# Altium PCB DSP5509_FPGACIII.PcbDoc (part 1 of 3)
Units mm, origin at the board's own origin, x right, y up, seen from the top; angles counter-clockwise.
Board outline 143.99 x 90.04 mm, 2 copper layers (Top Layer, Bottom Layer); 303 components, 256 nets, 1061 pads, 215 vias.
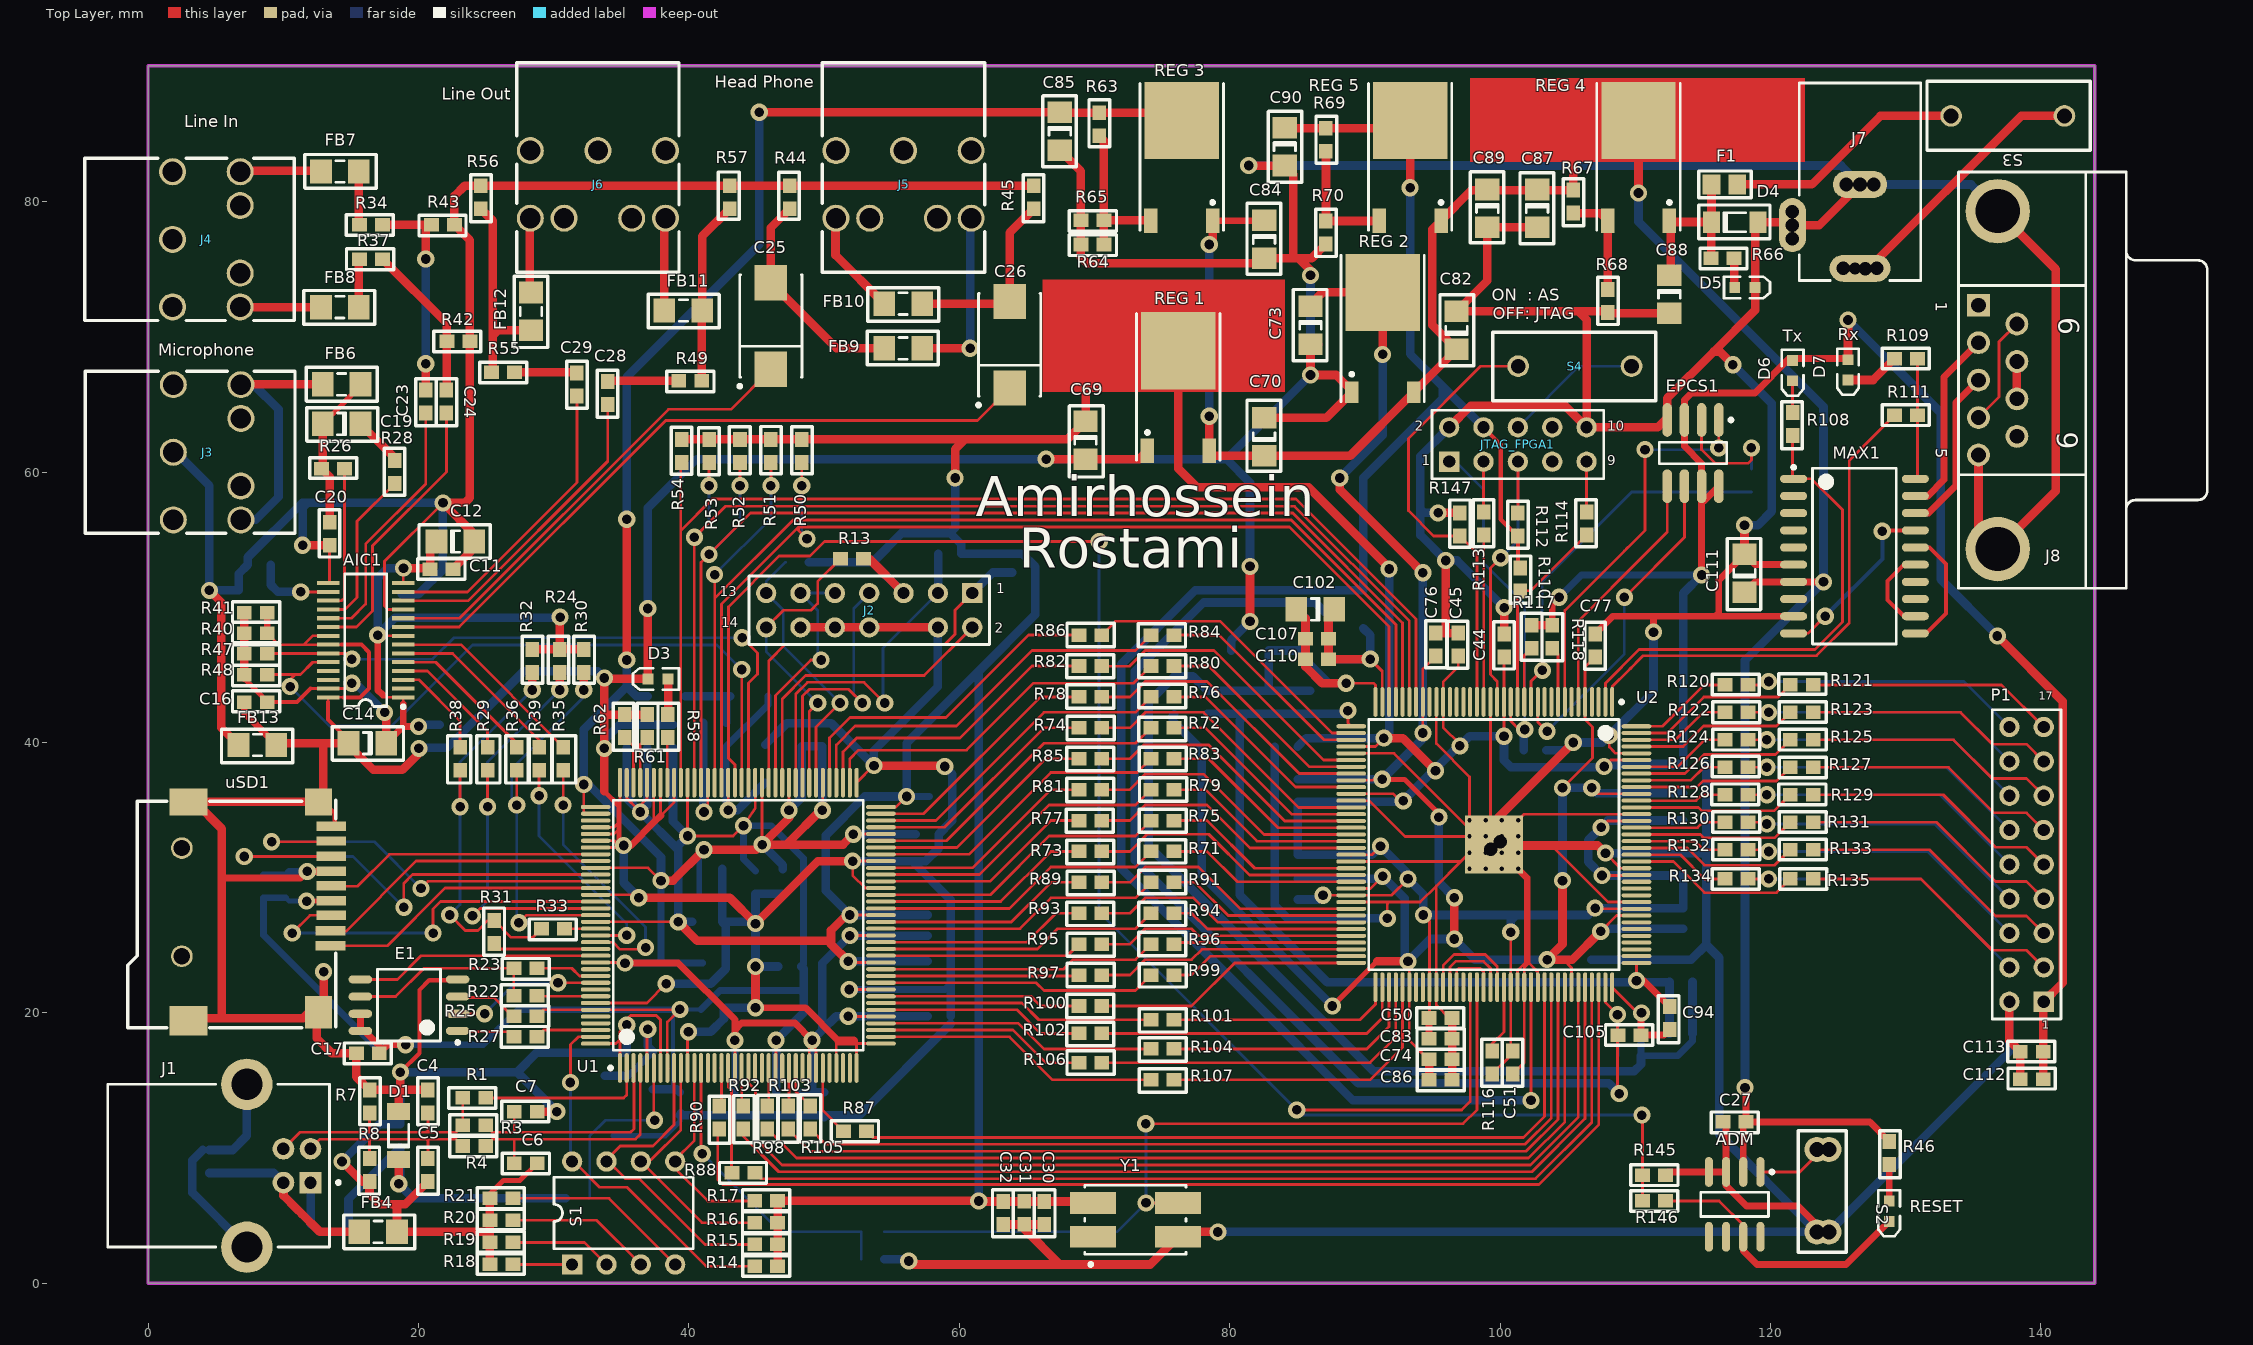
[diagram p0: Top Layer view]
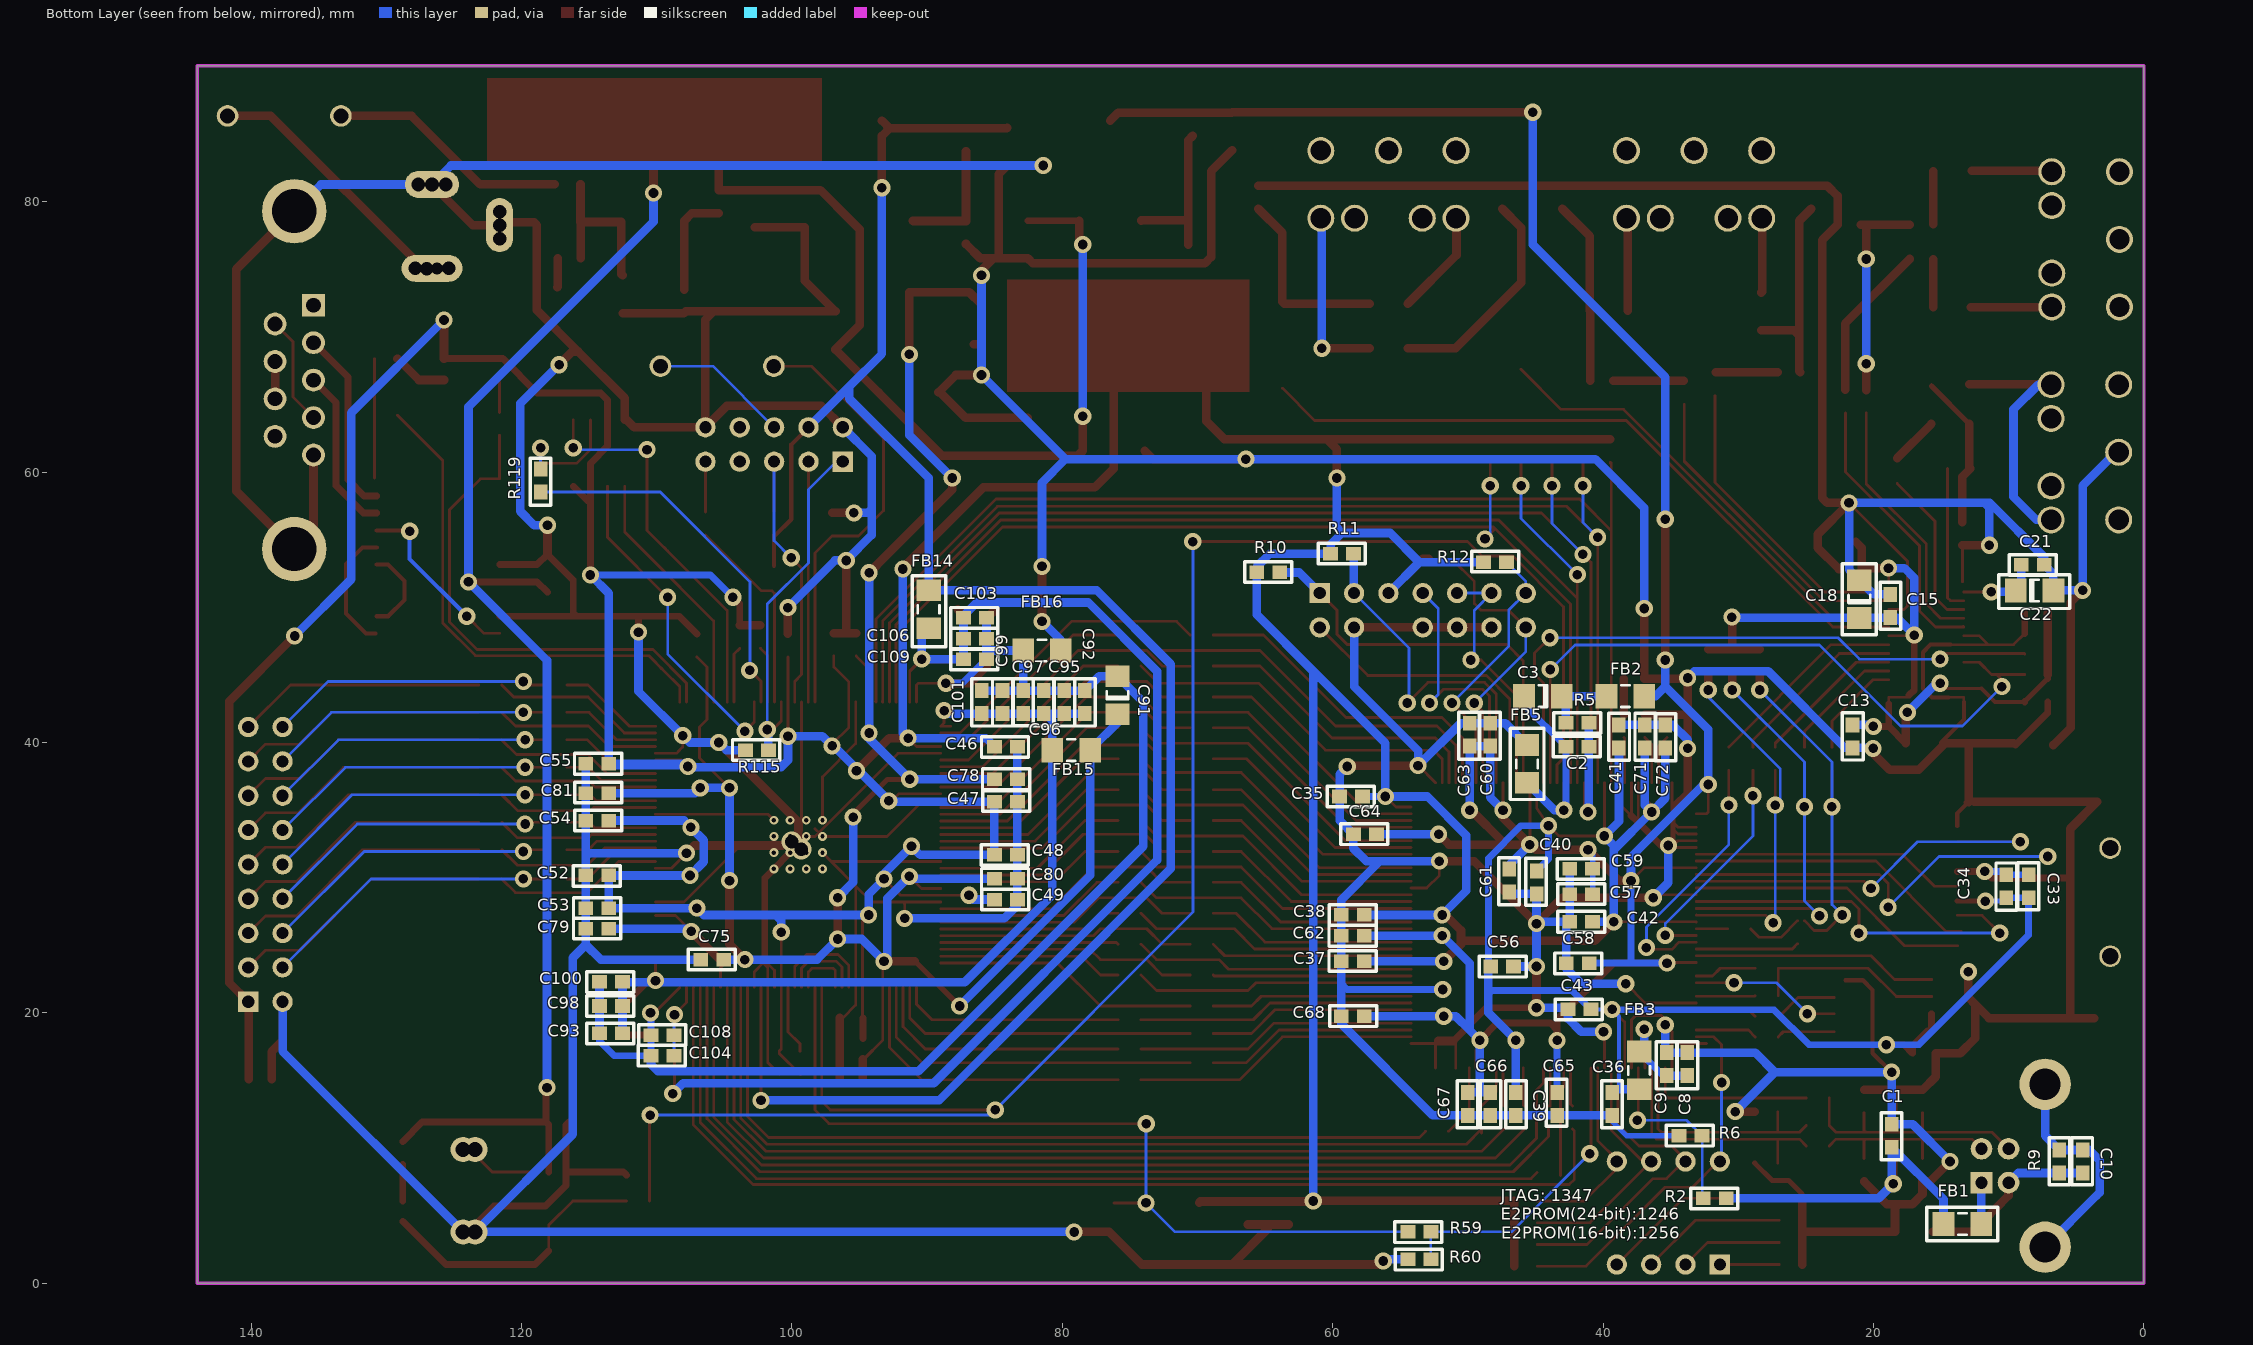
[diagram p1: Bottom Layer view, seen from below]

## Layer stack, top to bottom
Top Layer: signal copper 0.0356
Dielectric: core 0.32, FR-4, Dk 4.8
Bottom Layer: signal copper 0.0356

## Board outline
0,0 0,90.043 143.987,90.043 143.987,0

## Design rules (kind name [scope] priority, off if disabled: settings)
Clearance [All] p1: gap=0.178
HoleSize [All] p1: absolutevalues=TRUE maxlimit=10.16 minlimit=0.381 maxpercent=80.000 minpercent=20.000
PolygonConnect [All] p1: connectstyle=Relief reliefconductorwidth=0.254 reliefentries=4 polygonreliefangle="90 Angle"
RoutingVias [All] p1: holewidth=0.635 width=1.016 viastyle="Through Hole" minholewidth=0.711 minwidth=1.27 maxholewidth=0.711 maxwidth=1.27
SMDNeckDown [All] p1: percent=90.000
SolderMaskExpansion [All] p1: expansion=0.102
TestPointUsage [All] p1: valid=0 allowmultiple=FALSE
Testpoint [All] p1: side=15 testpointundercomponent=TRUE minsize=1.016 maxsize=2.54 preferedsize=1.524 minholesize=0 maxholesize=1.016 preferedholesize=0.813 testpointgrid=0.025 style=1023 order=0-112345678
Width power2.5V [(InNet('FPGA_VCCA_2.5V'))] p1: maxlimit=0.635 minlimit=0.203 preferedwidth=0.305
Width power [(InNet('+5V') OR InNet('+3.3V') OR InNet('DSP_CVCC') OR InNet('GND') OR InNet('FPGA_VINT_1.2V'))] p2: maxlimit=0.635 minlimit=0.203 preferedwidth=0.635
Width [All] p3: maxlimit=0.635 minlimit=0.203 preferedwidth=0.203
18 further rules are at their usual default settings.

## Classes and differential pairs
component class MMC: C33 C34 USD1
component class FPGA_JTAG: C91 C92 C93 C94 C95 C96 C97 C98 C99 C100 C101 C102 C103 C104 C105 C106 C107 C108 C109 C110 C111 D6 D7 EPCS1 FB14 FB15 FB16 J8 JTAG_FPGA1 MAX1 R108 R109 R110 R111 R112 R113 R114 R115 R116 R117 R118 R119 R147 S4 U2
component class INT_Reset_CLK: ADM AIC1 C11 C12 C13 C14 C15 C16 C17 C18 C19 C20 C21 C22 C23 C24 C25 C26 C27 C28 C29 C30 C31 C32 D3 E1 FB6 FB7 FB8 FB9 FB10 FB11 FB12 FB13 "Head Phone Out" J3 J4 J5 J6 R22 R23 R24 R25 R26 R27 R28 R29 R30 R31 R32 R33 R34 R35 R36 R37 R38 R39 R40 R41 R42 R43 R44 R45 R46 R47 R48 R49 R50 R51 R52 R53 R54 R55 R56 R57 R58 R59 R60 R145 R146 RESET S2 Y1
component class INTERFACE: R71 R72 R73 R74 R75 R76 R77 R78 R79 R80 R81 R82 R83 R84 R85 R86 R87 R88 R89 R90 R91 R92 R93 R94 R95 R96 R97 R98 R99 R100 R101 R102 R103 R104 R105 R106 R107 U1
component class JTAG_DSP: J2 R10 R11 R12 R13 R14 R15 R16 R17 R18 R19 R20 R21 R205 S1
component class output: C112 C113 P1 R120 R121 R122 R123 R124 R125 R126 R127 R128 R129 R130 R131 R132 R133 R134 R135
component class power: C35 C36 C37 C38 C39 C40 C41 C42 C43 C44 C45 C46 C47 C48 C49 C50 C51 C52 C53 C54 C55 C56 C57 C58 C59 C60 C61 C62 C63 C64 C65 C66 C67 C68 C69 C70 C71 C72 C73 C74 C75 C76 C77 C78 C79 C80 C81 C82 C83 C84 C85 C86 C87 C88 C89 C90 D4 D5 F1 J7 R61 R62 R63 R64 R65 R66 R67 R68 R69 R70 "REG 1" "REG 2" "REG 3" "REG 4" "REG 5" S3
component class USB: C1 C2 C3 C4 C5 C6 C7 C8 C9 C10 D1 FB1 FB2 FB3 FB4 FB5 J1 R1 R2 R3 R4 R5 R6 R7 R8 R9

## Components (designator, comment, footprint, x,y, rotation, side; value= is the part's Value field where it differs from the comment)
ADM "IMP706CSA" SO-8_N 117.348,5.842 r270 top
AIC1 "TLV320AIC23BIPW" TSSOP28 16.098,47.566 r90 top (schematic designator A1)
C1 "10nF" 1608[0603] 18.669,10.922 r90 bottom
C2 "10nF" 1608[0603] 41.907,39.692 r0 bottom
C3 "10uF" C1206 44.45,43.434 r0 bottom
C4 "47pF" 1608[0603] 20.701,13.462 r90 top
C5 "47pF" 1608[0603] 20.701,8.382 r270 top
C6 "22pF" 1608[0603] 27.94,8.89 r0 top
C7 "24pF" 1608[0603] 27.94,12.7 r0 top
C8 "10nF" 1608[0603] 33.782,16.217 r90 bottom
C9 "10nF" 1608[0603] 35.306,16.217 r90 bottom
C10 "100nF" 1608[0603] 4.538,9.014 r90 bottom
C11 "100nF" 1608[0603] 21.717,52.832 r0 top
C12 "10uF" c1206 22.733,54.864 r0 top
C13 "100nF" 1608[0603] 21.559,40.454 r270 bottom
C14 "10uF" c1206 16.225,39.946 r180 top
C15 "100nF" 1608[0603] 18.765,50.106 r90 bottom
C16 "100nF" 1608[0603] 7.97,42.994 r180 top
C17 "100nF" 1608[0603] 16.256,17.018 r180 top
C18 "10uF" c1206 21.051,50.614 r90 bottom
C19 "1uF" c1206 14.32,63.568 r180 top
C20 "47pF" 1608[0603] 13.431,55.44 r270 top
C21 "100nF" 1608[0603] 8.227,53.154 r180 bottom
C22 "10uF" c1206 8.097,51.249 r180 bottom
C23 "470nF" 1608[0603] 20.543,65.219 r90 top
C24 "470nF" 1608[0603] 22.067,65.219 r90 top
C25 "Cap Pol3" TC7343-2917 46.07,70.807 r90 top
C26 "220uF" TC7343-2917 63.723,69.41 r90 top
C27 "100nF" 1608[0603] 117.348,11.938 r0 top
C28 "470nF" 1608[0603] 34.005,65.854 r270 top
C29 "470nF" 1608[0603] 31.719,66.489 r270 top
C30 "1uF" 1608[0603] 66.294,5.207 r270 top
C31 "100nF" 1608[0603] 64.801,5.227 r270 top
C32 "10nF" 1608[0603] 63.246,5.207 r270 top
C33 "100nF" 1608[0603] 8.54,29.368 r270 bottom
C34 "100nF" 1608[0603] 10.191,29.368 r270 bottom
C35 "100nF" 1608[0603] 58.643,36.009 r0 bottom
C36 "100nF" 1608[0603] 39.339,13.276 r270 bottom
C37 "100nF" 1608[0603] 58.516,23.817 r0 bottom
C38 "100nF" 1608[0603] 58.516,27.246 r0 bottom
C39 "100nF" 1608[0603] 46.451,13.276 r270 bottom
C40 "100nF" 1608[0603] 44.927,29.659 r270 bottom
C41 "100nF" 1608[0603] 38.831,40.454 r90 bottom
C42 "100nF" 1608[0603] 41.625,26.738 r0 bottom
C43 "100nF" 1608[0603] 41.752,20.261 r0 bottom
C44 "100nF" 1608[0603] 100.299,47.185 r90 top
C45 "100nF" 1608[0603] 96.901,47.244 r90 top
C46 "100nF" 1608[0603] 84.17,39.692 r180 bottom
C47 "100nF" 1608[0603] 84.17,35.628 r180 bottom
C48 "100nF" 1608[0603] 84.17,31.691 r180 bottom
C49 "100nF" 1608[0603] 84.17,28.389 r180 bottom
C50 "100nF" 1608[0603] 95.6,19.626 r0 top
C51 "100nF" 1608[0603] 100.934,16.324 r270 top
C52 "100nF" 1608[0603] 114.396,30.167 r0 bottom
C53 "100nF" 1608[0603] 114.396,27.754 r0 bottom
C54 "100nF" 1608[0603] 114.396,34.231 r0 bottom
C55 "100nF" 1608[0603] 114.396,38.422 r0 bottom
C56 "4.7uF" 1608[0603] 47.467,23.436 r0 bottom
C57 "4.7uF" 1608[0603] 41.625,28.77 r180 bottom
C58 "100nF" 1608[0603] 41.879,23.69 r0 bottom
C59 "100nF" 1608[0603] 41.625,30.675 r0 bottom
C60 "100nF" 1608[0603] 48.356,40.581 r90 bottom
C61 "100nF" 1608[0603] 46.959,29.786 r270 bottom
C62 "100nF" 1608[0603] 58.516,25.722 r0 bottom
C63 "100nF" 1608[0603] 49.88,40.581 r90 bottom
C64 "100nF" 1608[0603] 57.627,33.215 r0 bottom
C65 "100nF" 1608[0603] 43.403,13.276 r270 bottom
C66 "100nF" 1608[0603] 48.356,13.276 r270 bottom
C67 "100nF" 1608[0603] 50.007,13.276 r270 bottom
C68 "100nF" 1608[0603] 58.516,19.753 r0 bottom
C69 "22uF" C1206 69.342,62.357 r270 top
C70 "10uF" C1206 82.55,62.611 r90 top
C71 "1onF" 1608[0603] 36.926,40.454 r90 bottom
C72 "10nF" 1608[0603] 35.402,40.454 r90 bottom
C73 "22uF" C1206 85.979,70.866 r270 top
C74 "100nF" 1608[0603] 95.6,16.578 r0 top
C75 "100nF" 1608[0603] 105.887,23.944 r0 bottom
C76 "100nF" 1608[0603] 95.25,47.244 r90 top
C77 "100nF" 1608[0603] 107.03,47.185 r90 top
C78 "100nF" 1608[0603] 84.17,37.279 r180 bottom
C79 "100nF" 1608[0603] 114.396,26.23 r0 bottom
C80 "100nF" 1608[0603] 84.17,29.913 r180 bottom
C81 "100nF" 1608[0603] 114.396,36.263 r0 bottom
C82 "10uF" C1206 96.774,70.485 r90 top
C83 "4.7uF" 1608[0603] 95.6,18.102 r0 top
C84 "1uF" C1206 82.55,77.216 r270 top
C85 "1uF" C1206 67.437,85.217 r270 top
C86 "4.7uF" 1608[0603] 95.6,15.054 r180 top
C87 "22uF" C1206 102.743,79.502 r270 top
C88 "10uF" C1206 112.522,73.152 r270 top
C89 "1uF" C1206 99.06,79.502 r270 top
C90 "1uF" C1206 84.074,84.074 r270 top
C91 "470uF" C1206 75.915,43.502 r90 bottom
C92 "4.7uF" 1608[0603] 78.328,42.994 r90 bottom
C93 "100nF" 1608[0603] 113.38,18.483 r0 bottom
C94 "100nF" 1608[0603] 112.53,19.626 r270 top
C95 "100nF" 1608[0603] 79.852,42.994 r90 bottom
C96 "100nF" 1608[0603] 81.376,42.994 r90 bottom
C97 "100nF" 1608[0603] 82.9,42.994 r90 bottom
C98 "10nF" 1608[0603] 113.38,20.515 r0 bottom
C99 "10nF" 1608[0603] 84.424,42.994 r90 bottom
C100 "4.7nF" 1608[0603] 113.38,22.293 r0 bottom
C101 "2.2nF" 1608[0603] 85.948,42.994 r90 bottom
C102 "47uF" C1206 86.329,49.852 r180 top
C103 "4.7uF" 1608[0603] 86.456,49.217 r180 bottom
C104 "100nF" 1608[0603] 109.57,16.832 r0 bottom
C105 "22nF" 1608[0603] 109.57,18.356 r0 top
C106 "10nF" 1608[0603] 86.456,47.693 r180 bottom
C107 "4.7nF" 1608[0603] 86.456,47.693 r180 top
C108 "2.2nF" 1608[0603] 109.57,18.356 r0 bottom
C109 "2.2nF" 1608[0603] 86.456,46.169 r180 bottom
C110 "1nF" 1608[0603] 86.456,46.169 r180 top
C111 "1uF" C1206 118.079,52.519 r90 top
C112 "4.7uF" 1608[0603] 139.319,15.113 r0 top
C113 "100nF" 1608[0603] 139.319,17.145 r0 top
D1 "6.2V" MELF-D3513-1405 18.542,10.922 r270 top
D3 "Green" 1.6x0.8x0.4 37.719,44.704 r180 top
D4 "12V" MELF-D3512-1405 117.348,78.486 r180 top
D5 "LED green" 1.6X0.8X0.4 118.11,73.66 r0 top
D6 "Yellow" 1.6X0.8X0.4 121.635,67.505 r270 top
D7 "Yellow" 1.6X0.8X0.4 125.73,67.564 r270 top
E1 "EEPROM-25f1024" MX25l1605A 19.304,20.574 r180 top
EPCS1 "EPCS4SI8N" SOIC8_M 114.269,61.409 r270 top
F1 "Fuse 3A" 2012[0805] 116.586,81.28 r180 top
FB1 "50" 3216[1206] 13.431,4.386 r180 bottom
FB2 "50" 3216[1206] 38.354,43.434 r0 bottom
FB3 "50" 3216[1206] 37.338,15.748 r270 bottom
FB4 "50" 3216[1206] 17.018,3.81 r180 top
FB5 "50" 3216[1206] 45.637,38.422 r90 bottom
FB6 "50" 3216[1206] 14.32,66.489 r180 top
FB7 "50" 3216[1206] 14.193,82.237 r180 top
FB8 "50" 3216[1206] 14.193,72.204 r180 top
FB9 "50" 3216[1206] 55.849,69.156 r180 top
FB10 "50" 3216[1206] 55.849,72.458 r0 top
FB11 "50" 3216[1206] 39.593,71.95 r0 top
FB12 "50" 3216[1206] 28.321,71.882 r270 top
FB13 "50" 3216[1206] 8.097,39.819 r0 top
FB14 "Ferrite Bead" 3216[1206] 89.885,49.852 r90 bottom
FB15 "50" 3216[1206] 79.344,39.438 r180 bottom
FB16 "50" 3216[1206] 81.503,46.804 r180 bottom
J1 "4-1437106-8" 1437106 11.018,8.704 r180 top
J2 "JTAG Header" HDR2X7 60.96,51.054 r180 top
J3 "Microphone In" "stereo jack socket" 4.369,61.468 r90 top
J4 "Line In" "stereo jack socket" 4.318,77.216 r90 top
J5 "Head Phone Out" "stereo jack socket" 55.88,81.28 r0 top
J6 "Line Out" "stereo jack socket" 33.274,81.28 r0 top
J7 "Power Jack" KLD-0202 126.619,88.773 r270 top
J8 "D Connector 9" DSUB1.385-2H9 146.304,66.802 r270 top
JTAG_FPGA1 "Header 5X2" HDR2X5 96.235,60.774 r0 top
MAX1 "SP233ACT" WSO20_L 126.207,53.789 r0 top
P1 "Header 9X2" HDR2X9 140.208,20.828 r90 top
R1 "1.5k" J1-0603 24.13,13.716 r0 top
R2 "300k" J1-0603 31.75,6.291 r0 bottom
R3 "24" J1-0603 24.13,11.684 r0 top
R4 "24" J1-0603 24.13,10.16 r0 top
R5 "10" J1-0603 41.907,41.47 r0 bottom
R6 "680k" J1-0603 33.528,10.922 r0 bottom
R7 "1M" J1-0603 16.383,13.462 r90 top
R8 "1M" J1-0603 16.383,8.382 r270 top
R9 "1M" J1-0603 6.26,9.014 r270 bottom
R10 "3.3k" J1-0603 64.77,52.578 r0 bottom
R11 "3.3k" J1-0603 59.309,53.975 r0 bottom
R12 "10k" J1-0603 48.006,53.34 r0 bottom
R13 "10k" J1-0603 52.07,53.594 r0 top
R14 "10k" J1-0603 45.72,1.27 r0 top
R15 "10k" J1-0603 45.72,2.879 r0 top
R16 "10k" J1-0603 45.72,4.487 r0 top
R17 "10k" J1-0603 45.72,6.096 r0 top
R18 "1k" J1-0603 26.131,1.397 r0 top
R19 "1k" J1-0603 26.131,3.028 r0 top
R20 "1k" J1-0603 26.131,4.66 r0 top
R21 "1k" J1-0603 26.131,6.291 r0 top
R22 "33" J1-0603 27.909,21.277 r180 top
R23 "33" J1-0603 27.909,23.309 r180 top
R24 "10k" J1-0603 30.449,46.042 r90 top
R25 "33" J1-0603 27.909,19.753 r180 top
R26 "2.2k" J1-0603 13.685,60.266 r180 top
R27 "33" J1-0603 27.909,18.229 r180 top
R28 "4.7k" J1-0603 18.257,60.012 r90 top
R29 "33" J1-0603 25.115,38.803 r270 top
R30 "10k" J1-0603 32.227,46.042 r90 top
R31 "33" J1-0603 25.623,25.976 r270 top
R32 "10k" J1-0603 28.417,46.042 r90 top
R33 "33" J1-0603 29.941,26.23 r0 top
R34 "4.7k" J1-0603 16.479,78.3 r0 top
R35 "33" J1-0603 30.703,38.803 r270 top
R36 "33" J1-0603 27.274,38.803 r270 top
R37 "4.7K" J1-0603 16.479,75.76 r0 top
R38 "33" J1-0603 23.083,38.803 r270 top
R39 "33" J1-0603 28.925,38.803 r270 top
R40 "10k" J1-0603 7.97,48.074 r0 top
R41 "10k" J1-0603 7.97,49.598 r0 top
R42 "4.7k" J1-0603 22.956,69.664 r180 top
R43 "4.7k" J1-0603 21.813,78.3 r180 top
R44 "47k" J1-0603 47.467,80.332 r270 top
R45 "47k" J1-0603 65.501,80.332 r270 top
R46 "10k" J1-0603 128.778,9.652 r90 top
R47 "10k" J1-0603 7.97,46.55 r0 top
R48 "10k" J1-0603 7.97,45.026 r0 top
R49 "100" J1-0603 40.101,66.743 r0 top
R50 "10k" J1-0603 48.356,61.575 r90 top
R51 "10k" J1-0603 46.07,61.575 r90 top
R52 "10k" J1-0603 43.784,61.575 r90 top
R53 "10k" J1-0603 41.498,61.575 r90 top
R54 "10k" J1-0603 39.466,61.575 r90 top
R55 "100" J1-0603 26.258,67.378 r180 top
R56 "47k" J1-0603 24.607,80.332 r270 top
R57 "47k" J1-0603 43.022,80.332 r270 top
R58 "4.7k" J1-0603 38.45,41.216 r270 top
R59 "1.5k" J1-0603 53.594,3.81 r180 bottom
R60 "1k" J1-0603 53.594,1.778 r180 bottom
R61 "47K" J1-0603 36.926,41.216 r270 top
R62 "47k" J1-0603 35.275,41.216 r270 top
R63 "240" J1-0603 70.358,85.725 r90 top
R64 "100" J1-0603 69.85,76.835 r0 top
R65 "200" J1-0603 69.85,78.613 r0 top
R66 "1K" J1-0603 116.459,75.819 r180 top
R67 "120" J1-0603 105.41,80.01 r90 top
R68 "360" J1-0603 107.95,72.644 r90 top
R69 "240" J1-0603 87.122,84.582 r90 top
R70 "240" J1-0603 87.122,77.724 r90 top
R71 "33" J1-0603 75.026,31.945 r180 top
R72 "33" J1-0603 75.026,41.089 r0 top
R73 "33" J1-0603 69.692,31.945 r180 top
R74 "33" J1-0603 69.692,41.089 r0 top
R75 "33" J1-0603 75.026,34.231 r180 top
R76 "33" J1-0603 75.026,43.375 r0 top
R77 "33" J1-0603 69.692,34.231 r180 top
R78 "33" J1-0603 69.692,43.375 r0 top
R79 "33" J1-0603 75.026,36.517 r180 top
R80 "33" J1-0603 75.026,45.661 r0 top
R81 "33" J1-0603 69.692,36.517 r180 top
R82 "33" J1-0603 69.692,45.661 r0 top
R83 "33" J1-0603 75.026,38.803 r180 top
R84 "33" J1-0603 75.026,47.947 r0 top
R85 "33" J1-0603 69.692,38.803 r180 top
R86 "33" J1-0603 69.692,47.947 r0 top
R87 "33" J1-0603 52.293,11.244 r180 top
R88 "33" J1-0603 44.038,8.196 r180 top
R89 "33" J1-0603 69.692,29.659 r0 top
R90 "33" J1-0603 42.26,12.26 r90 top
R91 "33" J1-0603 75.026,29.659 r0 top
R92 "33" J1-0603 44.038,12.26 r90 top
R93 "33" J1-0603 69.692,27.373 r0 top
R94 "33" J1-0603 75.026,27.373 r0 top
R95 "33" J1-0603 69.692,25.087 r0 top
R96 "33" J1-0603 75.026,25.087 r0 top
R97 "33" J1-0603 69.692,22.801 r0 top
R98 "33" J1-0603 45.816,12.26 r90 top
R99 "33" J1-0603 75.026,22.801 r0 top
R100 "33" J1-0603 69.692,20.515 r0 top
R101 "33" J1-0603 75.026,19.499 r0 top
R102 "33" J1-0603 69.692,18.483 r0 top
R103 "33" J1-0603 47.34,12.26 r90 top
R104 "33" J1-0603 75.026,17.34 r0 top
R105 "33" J1-0603 48.991,12.26 r90 top
R106 "33" J1-0603 69.692,16.324 r0 top
R107 "33" J1-0603 75.026,15.054 r0 top
R108 "330" J1-0603 121.635,63.568 r270 top
R109 "330" J1-0603 130.017,68.394 r0 top
R110 "3.3k" J1-0603 101.473,52.07 r90 top
R111 "330" J1-0603 130.017,64.203 r0 top
R112 "3.3k" J1-0603 101.315,56.134 r270 top
R113 "25" J1-0603 98.775,56.202 r90 top
R114 "25" J1-0603 106.395,56.202 r90 top
R115 "1k" J1-0603 102.585,39.438 r0 bottom
R116 "10k" J1-0603 99.41,16.324 r90 top
R117 "10k" J1-0603 102.331,47.82 r270 top
R118 "10k" J1-0603 103.855,47.82 r270 top
R119 "25" J1-0603 118.587,59.377 r90 bottom
R120 "33" J1-0603 117.483,44.264 r0 top
R121 "33" J1-0603 122.309,44.264 r0 top
R122 "33" J1-0603 117.483,42.232 r0 top
R123 "33" J1-0603 122.309,42.232 r0 top
R124 "33" J1-0603 117.483,40.2 r0 top
R125 "33" J1-0603 122.309,40.2 r0 top
R126 "33" J1-0603 117.483,38.168 r0 top
R127 "33" J1-0603 122.309,38.168 r0 top
R128 "33" J1-0603 117.483,36.136 r0 top
R129 "33" J1-0603 122.309,36.136 r0 top
R130 "33" J1-0603 117.483,34.104 r0 top
R131 "33" J1-0603 122.309,34.104 r0 top
R132 "33" J1-0603 117.483,32.072 r0 top
R133 "33" J1-0603 122.309,32.072 r0 top
R134 "33" J1-0603 117.483,29.913 r0 top
R135 "33" J1-0603 122.309,29.913 r0 top
R145 "1.5k" J1-0603 111.379,8.001 r180 top
R146 "1k" J1-0603 111.379,6.096 r0 top
R147 "10k" J1-0603 97.028,56.134 r90 top
"REG 1" "FAN1086" 369A-13#1 76.2,65.278 r0 top
"REG 2" "FAN1112" 369A-13#2 91.313,69.596 r0 top
"REG 3" "LM317MDTRK" 369A-13#3 76.454,82.296 r180 top
"REG 4" "LD1085CDT" 369A-13#3 110.236,82.296 r180 top
"REG 5" "LM317MDTRK" 369A-13#3 93.345,82.296 r180 top
RESET "LED RED" 1.6X0.8X0.4 128.778,5.334 r270 top (schematic designator D2)
S1 "SW-DIP4" DIP-8 35.179,5.207 r0 top
S2 "SW-PB" RESET_KEY 123.444,2.794 r0 top
S3 "SW-SPST" DIP_SW_1 141.732,86.36 r90 top
S4 "SW-SPST" DIP_SW_1 101.346,67.818 r270 top
U1 "TMS320VC5509APGE" TMSVC5509APGA 43.657,26.484 r90 top
U2 "EP3C5E144C8N" EQFP144_N 99.537,32.453 r270 top
uSD1 "MicroSD" SD_MMC_SOCKET 7.778,27.618 r270 top (schematic designator USD?)
Y1 "Oscillator" "CRYSTAL OSCILLATOR" 73.406,4.953 r0 top (schematic designator Cr)

## Footprints (in the part's own frame and the unit in brackets; to place one, negate y for a bottom-side part, rotate by r counter-clockwise, add the part's x,y. Pads: shape width x height; smd on the part's side, far side on the other; paste and mask are expansions set on the pad)
1.6x0.8x0.4 [mm] "SM LED; 2 Flat Leads"
  rect 0.8x0.8 smd: 1(-0.75,0) 2(0.75,0)
  silkscreen extent -1.55,-0.8 1.85,0.8
1.6X0.8X0.4 [mm] "SM LED; 2 Flat Leads"
  rect 0.8x0.8 smd: 1(-0.75,0) 2(0.75,0)
  silkscreen extent -1.55,-0.8 1.85,0.8
369A-13#1 [mm] "D-PAK/TO-252-AA; 3 Leads (1 Cropped); Body 10.3 (inc. leads) x 6.7 mm (LxW max)"
  rect 1x1.8 smd: 1(-2.285,-3.7) 3(2.285,-3.7)
  rect 5.5x5.7 smd: 4(0,3.7)
  silkscreen extent -3.09,-4.4 3.09,6.45
369A-13#2 [mm] "D-PAK/TO-252-AA; 3 Leads (1 Cropped); Body 10.3 (inc. leads) x 6.7 mm (LxW max)"
  rect 1x1.6 smd: 1(-2.285,-3.7) 3(2.285,-3.7)
  rect 5.5x5.7 smd: 4(0,3.7)
  silkscreen extent -3.09,-4.4 3.09,6.45
369A-13#3 [mm] "D-PAK/TO-252-AA; 3 Leads (1 Cropped); Body 10.3 (inc. leads) x 6.7 mm (LxW max)"
  rect 1x1.8 smd: 1(2.285,3.7) 3(-2.285,3.7)
  rect 5.5x5.7 smd: 4(0,-3.7)
  silkscreen extent -3.08,-6.45 3.08,4.4
1608[0603] [mm] "Chip Capacitor; Body 1.6 x 0.8 mm (LxW typ)"
  rect 1.1x1 smd: 1(-0.85,0) 2(0.85,0)
2012[0805] [mm] "Chip Resistor; Body 2.0 x 1.3 mm (LxW typ)"
  rect 1.3x1.5 smd: 1(-0.95,0) 2(0.95,0)
3216[1206] [mm] "Chip Resistor; Body 3.2 x 1.6 mm (LxW typ)"
  rect 1.6x1.8 smd: 1(-1.4,0) 2(1.4,0)
  silkscreen extent -0.3,-0.8 0.3,0.8
1437106 [mm] "Connector; USB1.1, Type B, Thru-Hole; 4 Position; Right Angle"
  rect 1.6x1.6 hole 0.92: 1(-1,1.25)
  round 1.6 hole 0.92: 2(-1,-1.25) 3(1,-1.25) 4(1,1.25)
  round 3.8 hole 2.3: 5(3.71,6.02) 6(3.71,-6.02)
  silkscreen extent -3.18,-6.02 13.99,6.02
C1206 [mm] "Chip Capacitor; Body 3.2 x 1.6 mm (LxW typ)"
  rect 1.6x1.8 smd: 1(-1.4,0) 2(1.4,0)
  silkscreen extent -0.3,-0.8 0.3,0.8
c1206 [mm] "Chip Capacitor; Body 3.2 x 1.6 mm (LxW typ)"
  rect 1.6x1.8 smd: 1(-1.4,0) 2(1.4,0)
  silkscreen extent -0.3,-0.8 0.3,0.8
"CRYSTAL OSCILLATOR" [mm]
  rect 3.4x1.6 smd: 1(-3.531,-1.504) 2(2.769,-1.504) 3(2.769,0.996) 4(-3.531,0.996)
  silkscreen extent -4.13,-3.68 3.37,2.3
DIP-8 [mm] "DIP; 8 Leads; Row Spacing 7.62 mm; Pitch 2.54 mm"
  rect 1.5x1.5 hole 0.9: 1(-3.81,-3.81)
  round 1.5 hole 0.9: 2(-1.27,-3.81) 3(1.27,-3.81) 4(3.81,-3.81) 5(3.81,3.81) 6(1.27,3.81) 7(-1.27,3.81) 8(-3.81,3.81)
  silkscreen extent -5.15,-2.65 5.15,2.65
DIP_SW_1 [mm]
  round 1.6 hole 1.1: 1(-0.016,-0.007) 2(-0.016,8.375)
  silkscreen extent -2.54,-1.91 2.54,10.16
DSUB1.385-2H9 [mm] "Connector; D Subminiature; 9 Position; Right Angle; Pitch 1.385 mm"
  rect 1.69x1.69 hole 1.09: 1(-5.54,-10.92)
  round 1.69 hole 1.09: 2(-2.77,-10.92) 3(0,-10.92) 4(2.77,-10.92) 5(5.54,-10.92) 6(-4.155,-8.08) 7(-1.385,-8.08) 8(1.385,-8.08) 9(4.155,-8.08)
  round 4.76 hole 3.26: 10(-12.495,-9.5) 11(12.495,-9.5)
  silkscreen extent -15.4,-12.4 15.4,6
EQFP144_N [mm] "Thin QFP, 144-Leads, Body 20x20mm, Pitch 0.5mm, IPC Medium Density"
  oval 2.2x0.3 smd: 1(-10.55,8.75) 2(-10.55,8.25) 3(-10.55,7.75) 4(-10.55,7.25) 5(-10.55,6.75) 6(-10.55,6.25) 7(-10.55,5.75) 8(-10.55,5.25) 9(-10.55,4.75) 10(-10.55,4.25) 11(-10.55,3.75) 12(-10.55,3.25) 13(-10.55,2.75) 14(-10.55,2.25) 15(-10.55,1.75) 16(-10.55,1.25) 17(-10.55,0.75) 18(-10.55,0.25) 19(-10.55,-0.25) 20(-10.55,-0.75) 21(-10.55,-1.25) 22(-10.55,-1.75) 23(-10.55,-2.25) 24(-10.55,-2.75) 25(-10.55,-3.25) 26(-10.55,-3.75) 27(-10.55,-4.25) 28(-10.55,-4.75) 29(-10.55,-5.25) 30(-10.55,-5.75) 31(-10.55,-6.25) 32(-10.55,-6.75) 33(-10.55,-7.25) 34(-10.55,-7.75) 35(-10.55,-8.25) 36(-10.55,-8.75) 73(10.55,-8.75) 74(10.55,-8.25) 75(10.55,-7.75) 76(10.55,-7.25) 77(10.55,-6.75) 78(10.55,-6.25) 79(10.55,-5.75) 80(10.55,-5.25) 81(10.55,-4.75) 82(10.55,-4.25) 83(10.55,-3.75) 84(10.55,-3.25) 85(10.55,-2.75) 86(10.55,-2.25) 87(10.55,-1.75) 88(10.55,-1.25) 89(10.55,-0.75) 90(10.55,-0.25) 91(10.55,0.25) 92(10.55,0.75) 93(10.55,1.25) 94(10.55,1.75) 95(10.55,2.25) 96(10.55,2.75) 97(10.55,3.25) 98(10.55,3.75) 99(10.55,4.25) 100(10.55,4.75) 101(10.55,5.25) 102(10.55,5.75) 103(10.55,6.25) 104(10.55,6.75) 105(10.55,7.25) 107(10.55,8.25) 108(10.55,8.75)
  oval 0.3x2.2 smd: 37(-8.75,-10.55) 38(-8.25,-10.55) 39(-7.75,-10.55) 40(-7.25,-10.55) 41(-6.75,-10.55) 42(-6.25,-10.55) 43(-5.75,-10.55) 44(-5.25,-10.55) 45(-4.75,-10.55) 46(-4.25,-10.55) 47(-3.75,-10.55) 48(-3.25,-10.55) 49(-2.75,-10.55) 50(-2.25,-10.55) 51(-1.75,-10.55) 52(-1.25,-10.55) 53(-0.75,-10.55) 54(-0.25,-10.55) 55(0.25,-10.55) 56(0.75,-10.55) 57(1.25,-10.55) 58(1.75,-10.55) 59(2.25,-10.55) 60(2.75,-10.55) 61(3.25,-10.55) 62(3.75,-10.55) 63(4.25,-10.55) 64(4.75,-10.55) 65(5.25,-10.55) 66(5.75,-10.55) 67(6.25,-10.55) 68(6.75,-10.55) 69(7.25,-10.55) 70(7.75,-10.55) 71(8.25,-10.55) 72(8.75,-10.55) 109(8.75,10.55) 110(8.25,10.55) 111(7.75,10.55) 112(7.25,10.55) 113(6.75,10.55) 114(6.25,10.55) 115(5.75,10.55) 116(5.25,10.55) 117(4.75,10.55) 118(4.25,10.55) 119(3.75,10.55) 120(3.25,10.55) 121(2.75,10.55) 122(2.25,10.55) 123(1.75,10.55) 124(1.25,10.55) 125(0.75,10.55) 126(0.25,10.55) 127(-0.25,10.55) 128(-0.75,10.55) 129(-1.25,10.55) 130(-1.75,10.55) 131(-2.25,10.55) 132(-2.75,10.55) 133(-3.25,10.55) 134(-3.75,10.55) 135(-4.25,10.55) 136(-4.75,10.55) 137(-5.25,10.55) 138(-5.75,10.55) 139(-6.25,10.55) 140(-6.75,10.55) 141(-7.25,10.55) 142(-7.75,10.55) 143(-8.25,10.55) 144(-8.75,10.55)
  oval 2.2x0.3 smd paste+0: 106(10.55,7.75)
  rect 4.3x4.3 smd: 145(0,0)
  silkscreen extent -10.67,-9.25 9.25,9.58, body extent -10,-10 10,10, height 1.6
HDR2X5 [mm] "Connector; Header; 5x2 Position"
  rect 1.5x1.5 hole 0.9: 1(0,0)
  round 1.5 hole 0.9: 2(0,2.54) 3(2.54,0) 4(2.54,2.54) 5(5.08,0) 6(5.08,2.54) 7(7.62,0) 8(7.62,2.54) 9(10.16,0) 10(10.16,2.54)
  silkscreen extent -1.27,-1.27 11.43,3.81
HDR2X7 [mm]
  rect 1.5x1.5 hole 0.9: 1(0,0)
  round 1.5 hole 0.9: 2(0,2.54) 3(2.54,0) 4(2.54,2.54) 5(5.08,0) 7(7.62,0) 8(7.62,2.54) 9(10.16,0) 10(10.16,2.54) 11(12.7,0) 12(12.7,2.54) 13(15.24,0) 14(15.24,2.54)
  round 0 all layers, no hole: 6(5.08,2.54)
  silkscreen extent -1.27,-1.27 16.51,3.81
HDR2X9 [mm] "Connector; Header; 9x2 Position"
  rect 1.5x1.5 hole 0.9: 1(0,0)
  round 1.5 hole 0.9: 2(0,2.54) 3(2.54,0) 4(2.54,2.54) 5(5.08,0) 6(5.08,2.54) 7(7.62,0) 8(7.62,2.54) 9(10.16,0) 10(10.16,2.54) 11(12.7,0) 12(12.7,2.54) 13(15.24,0) 14(15.24,2.54) 15(17.78,0) 16(17.78,2.54) 17(20.32,0) 18(20.32,2.54)
  silkscreen extent -1.27,-1.27 21.59,3.81
J1-0603 [mm] "Chip Resistor; Body 1.6 x 0.8 mm (LxW typ)"
  rect 1.1x1 smd: 1(-0.85,0) 2(0.85,0)
KLD-0202 [mm] "DC Power Jack, 2.5mm, KLD Series, PCB Mount"
  oval 2x4.5 all layers, no hole: 1(13.7,0)
  round 1.5 hole 1: 1A(13.7,-1.25) 1B(13.7,1.25) 2A(7.5,-1) 2B(7.5,1) 3A(9.5,-5) 3B(11.5,-5)
  oval 2x4 all layers, no hole: 2(7.5,0)
  oval 4x2 all layers, no hole: 3(10.5,-5)
  silkscreen extent 0,-4.5 14.6,4.5
MELF-D3512-1405 [mm] "Metal Electrode Face (MELF) Diode; Body 3.5 x 1.5 mm (LxDia)"
  rect 1.25x1.6 smd: 1(-1.725,0) 2(1.725,0)
  silkscreen extent -0.8,-0.7 0.8,0.7
MELF-D3513-1405 [mm] "Metal Electrode Face (MELF) Diode; Body 3.5 x 1.6 mm (LxDia)"
  rect 1.25x1.7 smd: 1(-1.775,0) 2(1.775,0)
  silkscreen extent -0.85,-0.75 0.85,0.75
MX25l1605A [mm] "SOP, 8-Leads, Body 5.3x5.4mm (max), Pitch 1.27mm, IPC Medium Density"
  oval 1.75x0.6 smd: 1(-3.6,1.905) 2(-3.6,0.635) 3(-3.6,-0.635) 4(-3.6,-1.905) 5(3.6,-1.905) 6(3.6,-0.635) 7(3.6,0.635) 8(3.6,1.905)
  silkscreen extent -3.73,-2.65 2.32,2.88, body extent -2.69,-2.67 2.69,2.67, height 2.16
RESET_KEY [mm]
  round 1.85 hole 1.1: 0(0.873,1.009) 0(0.873,7.105) 1(-0.016,1.009) 2(-0.016,7.105)
  silkscreen extent -1.4,-0.51 2.16,8.51
SD_MMC_SOCKET [mm]
  round 1.6 hole 1.2: 0(-4.575,-5.275) 0(3.425,-5.275)
  rect 0.7x2.2 smd: 1(2.65,5.725) 2(1.55,5.725) 3(0.4,5.775) 4(-0.675,5.775) 5(-1.775,5.775) 6(-2.875,5.775) 7(-3.975,5.775) 8(-5.1,5.775) 9(-6.2,5.775)
  rect 2x2 smd: 10(-7.975,4.825)
  rect 2x2.8 smd: 11(-8,-4.775)
  rect 2.2x2.8 smd: 12(8.2,-4.775)
  rect 2.4x2 smd: 13(7.55,4.825)
  silkscreen extent -8.1,-9.27 8.7,6.1
SO-8_N [mm] "8-Pin Small Outline Integrated Circuit 1.27 mm Pitch, IPC Medium Density"
  oval 2.2x0.6 smd: 1(-2.4,1.905) 2(-2.4,0.635) 3(-2.4,-0.635) 4(-2.4,-1.905) 5(2.4,-1.905) 6(2.4,-0.635) 7(2.4,0.635) 8(2.4,1.905)
  silkscreen extent -2.52,-2.5 0.9,2.88, body extent -1.95,-2.45 1.95,2.45, height 1.75
SOIC8_M [mm] "SOIC, 8-Leads, Body 4.9x3.9mm, Pitch 1.27mm, IPC Low Density"
  oval 2.5x0.7 smd: 1(-2.45,1.905) 2(-2.45,0.635) 3(-2.45,-0.635) 4(-2.45,-1.905) 5(2.45,-1.905) 6(2.45,-0.635) 7(2.45,0.635) 8(2.45,1.905)
  silkscreen extent -2.57,-2.5 0.8,2.93, body extent -2,-2.5 2,2.5, height 1.75
"stereo jack socket" [mm]
  round 2 hole 1.5: 0(-5,2.5) 0(5,2.5) 1(0,2.5) 2(-5,-2.5) 3(-2.5,-2.5) 4(2.5,-2.5) 5(5,-2.5)
  silkscreen extent -6,-6.5 6,9
TC7343-2917 [mm] "Capacitor, SM Tantalum; Body 7.3 x 4.3 mm (LxW typ)"
  rect 2.6x2.4 smd: 1(-3.2,0) 2(3.2,0)
  silkscreen extent -4.57,-2.3 3.8,2.42
TMSVC5509APGA [mm] "Thin QFP, 144-Leads, Body 20x20mm, Pitch 0.5mm, IPC Medium Density"
  oval 2.2x0.3 smd: 1(-10.55,8.75) 2(-10.55,8.25) 3(-10.55,7.75) 4(-10.55,7.25) 5(-10.55,6.75) 6(-10.55,6.25) 7(-10.55,5.75) 8(-10.55,5.25) 9(-10.55,4.75) 10(-10.55,4.25) 11(-10.55,3.75) 12(-10.55,3.25) 13(-10.55,2.75) 14(-10.55,2.25) 15(-10.55,1.75) 16(-10.55,1.25) 17(-10.55,0.75) 18(-10.55,0.25) 19(-10.55,-0.25) 20(-10.55,-0.75) 21(-10.55,-1.25) 22(-10.55,-1.75) 23(-10.55,-2.25) 24(-10.55,-2.75) 25(-10.55,-3.25) 26(-10.55,-3.75) 27(-10.55,-4.25) 28(-10.55,-4.75) 29(-10.55,-5.25) 30(-10.55,-5.75) 31(-10.55,-6.25) 32(-10.55,-6.75) 33(-10.55,-7.25) 34(-10.55,-7.75) 35(-10.55,-8.25) 36(-10.55,-8.75) 73(10.55,-8.75) 74(10.55,-8.25) 75(10.55,-7.75) 76(10.55,-7.25) 77(10.55,-6.75) 78(10.55,-6.25) 79(10.55,-5.75) 80(10.55,-5.25) 81(10.55,-4.75) 82(10.55,-4.25) 83(10.55,-3.75) 84(10.55,-3.25) 85(10.55,-2.75) 86(10.55,-2.25) 87(10.55,-1.75) 88(10.55,-1.25) 89(10.55,-0.75) 90(10.55,-0.25) 91(10.55,0.25) 92(10.55,0.75) 93(10.55,1.25) 94(10.55,1.75) 95(10.55,2.25) 96(10.55,2.75) 97(10.55,3.25) 98(10.55,3.75) 99(10.55,4.25) 100(10.55,4.75) 101(10.55,5.25) 102(10.55,5.75) 103(10.55,6.25) 104(10.55,6.75) 105(10.55,7.25) 106(10.55,7.75) 107(10.55,8.25) 108(10.55,8.75)
  oval 0.3x2.2 smd: 37(-8.75,-10.55) 38(-8.25,-10.55) 39(-7.75,-10.55) 40(-7.25,-10.55) 41(-6.75,-10.55) 42(-6.25,-10.55) 43(-5.75,-10.55) 44(-5.25,-10.55) 45(-4.75,-10.55) 46(-4.25,-10.55) 47(-3.75,-10.55) 48(-3.25,-10.55) 49(-2.75,-10.55) 50(-2.25,-10.55) 51(-1.75,-10.55) 52(-1.25,-10.55) 53(-0.75,-10.55) 54(-0.25,-10.55) 55(0.25,-10.55) 56(0.75,-10.55) 57(1.25,-10.55) 58(1.75,-10.55) 59(2.25,-10.55) 60(2.75,-10.55) 61(3.25,-10.55) 62(3.75,-10.55) 63(4.25,-10.55) 64(4.75,-10.55) 65(5.25,-10.55) 66(5.75,-10.55) 67(6.25,-10.55) 68(6.75,-10.55) 69(7.25,-10.55) 70(7.75,-10.55) 71(8.25,-10.55) 72(8.75,-10.55) 109(8.75,10.55) 110(8.25,10.55) 111(7.75,10.55) 112(7.25,10.55) 113(6.75,10.55) 114(6.25,10.55) 115(5.75,10.55) 116(5.25,10.55) 117(4.75,10.55) 118(4.25,10.55) 119(3.75,10.55) 120(3.25,10.55) 121(2.75,10.55) 122(2.25,10.55) 123(1.75,10.55) 124(1.25,10.55) 125(0.75,10.55) 126(0.25,10.55) 127(-0.25,10.55) 128(-0.75,10.55) 129(-1.25,10.55) 130(-1.75,10.55) 131(-2.25,10.55) 132(-2.75,10.55) 133(-3.25,10.55) 134(-3.75,10.55) 135(-4.25,10.55) 136(-4.75,10.55) 137(-5.25,10.55) 138(-5.75,10.55) 139(-6.25,10.55) 140(-6.75,10.55) 141(-7.25,10.55) 142(-7.75,10.55) 143(-8.25,10.55) 144(-8.75,10.55)
  silkscreen extent -10.67,-9.25 9.25,9.57, body extent -10,-10 10,10, height 1.6
TSSOP28 [mm] "Shrink Small Outline; 28 Leads; Body Width 4.4 mm; Pitch 0.65 mm"
  rect 0.3x1.65 smd: 1(-4.225,-2.775) 2(-3.575,-2.775) 3(-2.925,-2.775) 4(-2.275,-2.775) 5(-1.625,-2.775) 6(-0.975,-2.775) 7(-0.325,-2.775) 8(0.325,-2.775) 9(0.975,-2.775) 10(1.625,-2.775) 11(2.275,-2.775) 12(2.925,-2.775) 13(3.575,-2.775) 14(4.225,-2.775) 15(4.225,2.775) 16(3.575,2.775) 17(2.925,2.775) 18(2.275,2.775) 19(1.625,2.775) 20(0.975,2.775) 21(0.325,2.775) 22(-0.325,2.775) 23(-0.975,2.775) 24(-1.625,2.775) 25(-2.275,2.775) 26(-2.925,2.775) 27(-3.575,2.775) 28(-4.225,2.775)
  silkscreen extent -5.05,-2.9 4.9,1.55
WSO20_L [mm] "20-Pin Small Outline Integrated Circuit 1.27 mm Pitch, IPC High Density"
  oval 2x0.6 smd: 1(-4.5,5.715) 2(-4.5,4.445) 3(-4.5,3.175) 4(-4.5,1.905) 5(-4.5,0.635) 6(-4.5,-0.635) 7(-4.5,-1.905) 8(-4.5,-3.175) 9(-4.5,-4.445) 10(-4.5,-5.715) 11(4.5,-5.715) 12(4.5,-4.445) 13(4.5,-3.175) 14(4.5,-1.905) 15(4.5,-0.635) 16(4.5,0.635) 17(4.5,1.905) 18(4.5,3.175) 19(4.5,4.445) 20(4.5,5.715)
  silkscreen extent -4.62,-6.5 3.1,6.69, body extent -3.75,-6.4 3.75,6.4, height 2.65

## Part data
ADM: library part ADM706AN, "Low-Cost uP Supervisory Circuit"
C1 C2 C3 C4 C5 C6 C7 C8 C9 C10 C11 C13 C15 C16 C17 C20 C21 C23 C24 C28 C29 C30 C31 C32 C33 C34: library part "Cap Semi", "Capacitor (Semiconductor SIM Model)"
C12 C14 C18 C19 C22 C26 C111: library part "Cap Pol3", "Polarized Capacitor (Surface Mount)"
C25: "Polarized Capacitor (Surface Mount)"
C27 C35 C36 C37 C38 C39 C40 C41 C42 C43 C44 C45 C46 C47 C48 C49 C50 C51 C52 C53 C54 C55 C56 C57 C58 C59 C60 C61 C62 C63 C64 C65 C66 C67 C68 C71 C72 C74 C75 C76 C77 C78 C79 C80 C81 C83 C86 C91 C92 C93 C94 C95 C96 C97 C98 C99 C100 C101 C102 C103 C104 C105 C106 C107 C108 C109 C110 C112 C113: library part "Cap Semi", "Capacitor"
C69 C70 C73 C82 C84 C85 C87 C88 C89 C90: library part "Cap Pol3", "Polarized Capacitor (Tantalium)"
D1: library part Diode, "Default Diode"
D3 D5 D6 D7 RESET: library part LED3, "Typical BLUE SiC LED"
D4: library part DL4742A, "Silicon Zener Diode"
E1: library part EEPROM_25_256
EPCS1: "EPCS4 Series, In-system programmable 3.3V serial configuration device, 8-Pin SOIC, 4-Megabit, Industrial Grade, Pb-Free"
F1: library part "Fuse 1", "Fuse"
FB1 FB2 FB3 FB4 FB5 FB6 FB7 FB8 FB9 FB10 FB11 FB12 FB13 FB15 FB16: library part "Ferrite Bead", "Ferrite Bead"
J1: library part 440068-1, "USB 1.1, Right Angle, Thru-Hole, Reverse Type, Receptacle, 4 Position, Black"
J2: "JTAG Header for DSP 5509"
J3 J4 J5 J6: library part "Stereo Jack Socket"
J7: library part PWR2.5, "Low Voltage Power Supply Connector"
J8: "Receptacle Assembly, 9 Position, Right Angle"
JTAG_FPGA1: "Header, 5-Pin, Dual row"
MAX1: library part MAX233AEWP, "+5V-Powered, Multichannel RS-232 Driver/Receiver"
P1: "Header, 9-Pin, Dual row"
R1 R2 R3 R4 R5 R6 R7 R8 R9 R10 R11 R12 R13 R14 R15 R16 R17 R18 R19 R20 R21 R22 R23 R24 R25 R26 R27 R28 R29 R30 R31 R32 R33 R34 R35 R36 R37 R38 R39 R40 R41 R42 R43 R44 R45 R46 R47 R48 R49 R50 R51 R52 R53 R54 R55 R56 R57 R58 R59 R60 R61 R62 R63 R64 R65 R66 R67 R68 R69 R70 R71 R72 R73 R74 R75 R76 R77 R78 R79 R80 R81 R82 R83 R84 R85 R86 R87 R88 R89 R90 R91 R92 R93 R94 R95 R96 R97 R98 R99 R100 R101 R102 R103 R104 R105 R106 R107 R108 R109 R110 R111 R112 R113 R114 R115 R116 R117 R118 R119 R120 R121 R122 R123 R124 R125 R126 R127 R128 R129 R130 R131 R132 R133 R134 R135 R145 R146 R147: library part Res3, "Resistor"
"REG 1": "1.5A, 3.3V Fixed Low Dropout Linear Regulator"
"REG 2": "1A 1.2V Low Dropout Linear Regulator"
"REG 3" "REG 5": "Three-Terminal Adjustable Output Positive Voltage Regulator"
"REG 4": library part LM317MDT, "Three-Terminal Adjustable Output Positive Voltage Regulator"
S1: library part "SW DIP-4", "DIP Switch, 4 Position, SPST"
S2: "Switch"
S3 S4: "Single-Pole, Single-Throw Switch"
U2: "Cyclone III Family FPGA, 94 I/O Pins, 4 PLLs, 144-Pin EQFP, Speed Grade 8, Commercial Grade, Pb-Free"
Y1: library part CFPX-5, "Surface Mount Quartz Crystal"

## Free pads (board coordinates)
  round 1.5 hole 1: 1(127,75.057) 2(121.619,78.273) 2C(126.619,81.273)
  round 1.5 hole 0.9: 3(126.238,75.057)

## Via types
v1: diameter 1.27, hole 0.711, Top Layer to Bottom Layer, 197 vias
v2: diameter 0.66, hole 0.33, Top Layer to Bottom Layer, tented top, 16 vias
v3: diameter 1.5, hole 1, Top Layer to Bottom Layer, 2 vias